# Altium PCB GR_Alim (1).PcbDoc
Units mm, origin at the board's own origin, x right, y up, seen from the top; angles counter-clockwise.
Board outline 100 x 97 mm, 2 copper layers (Top Layer, Bottom Layer); 40 components, 21 nets, 114 pads, 24 vias.
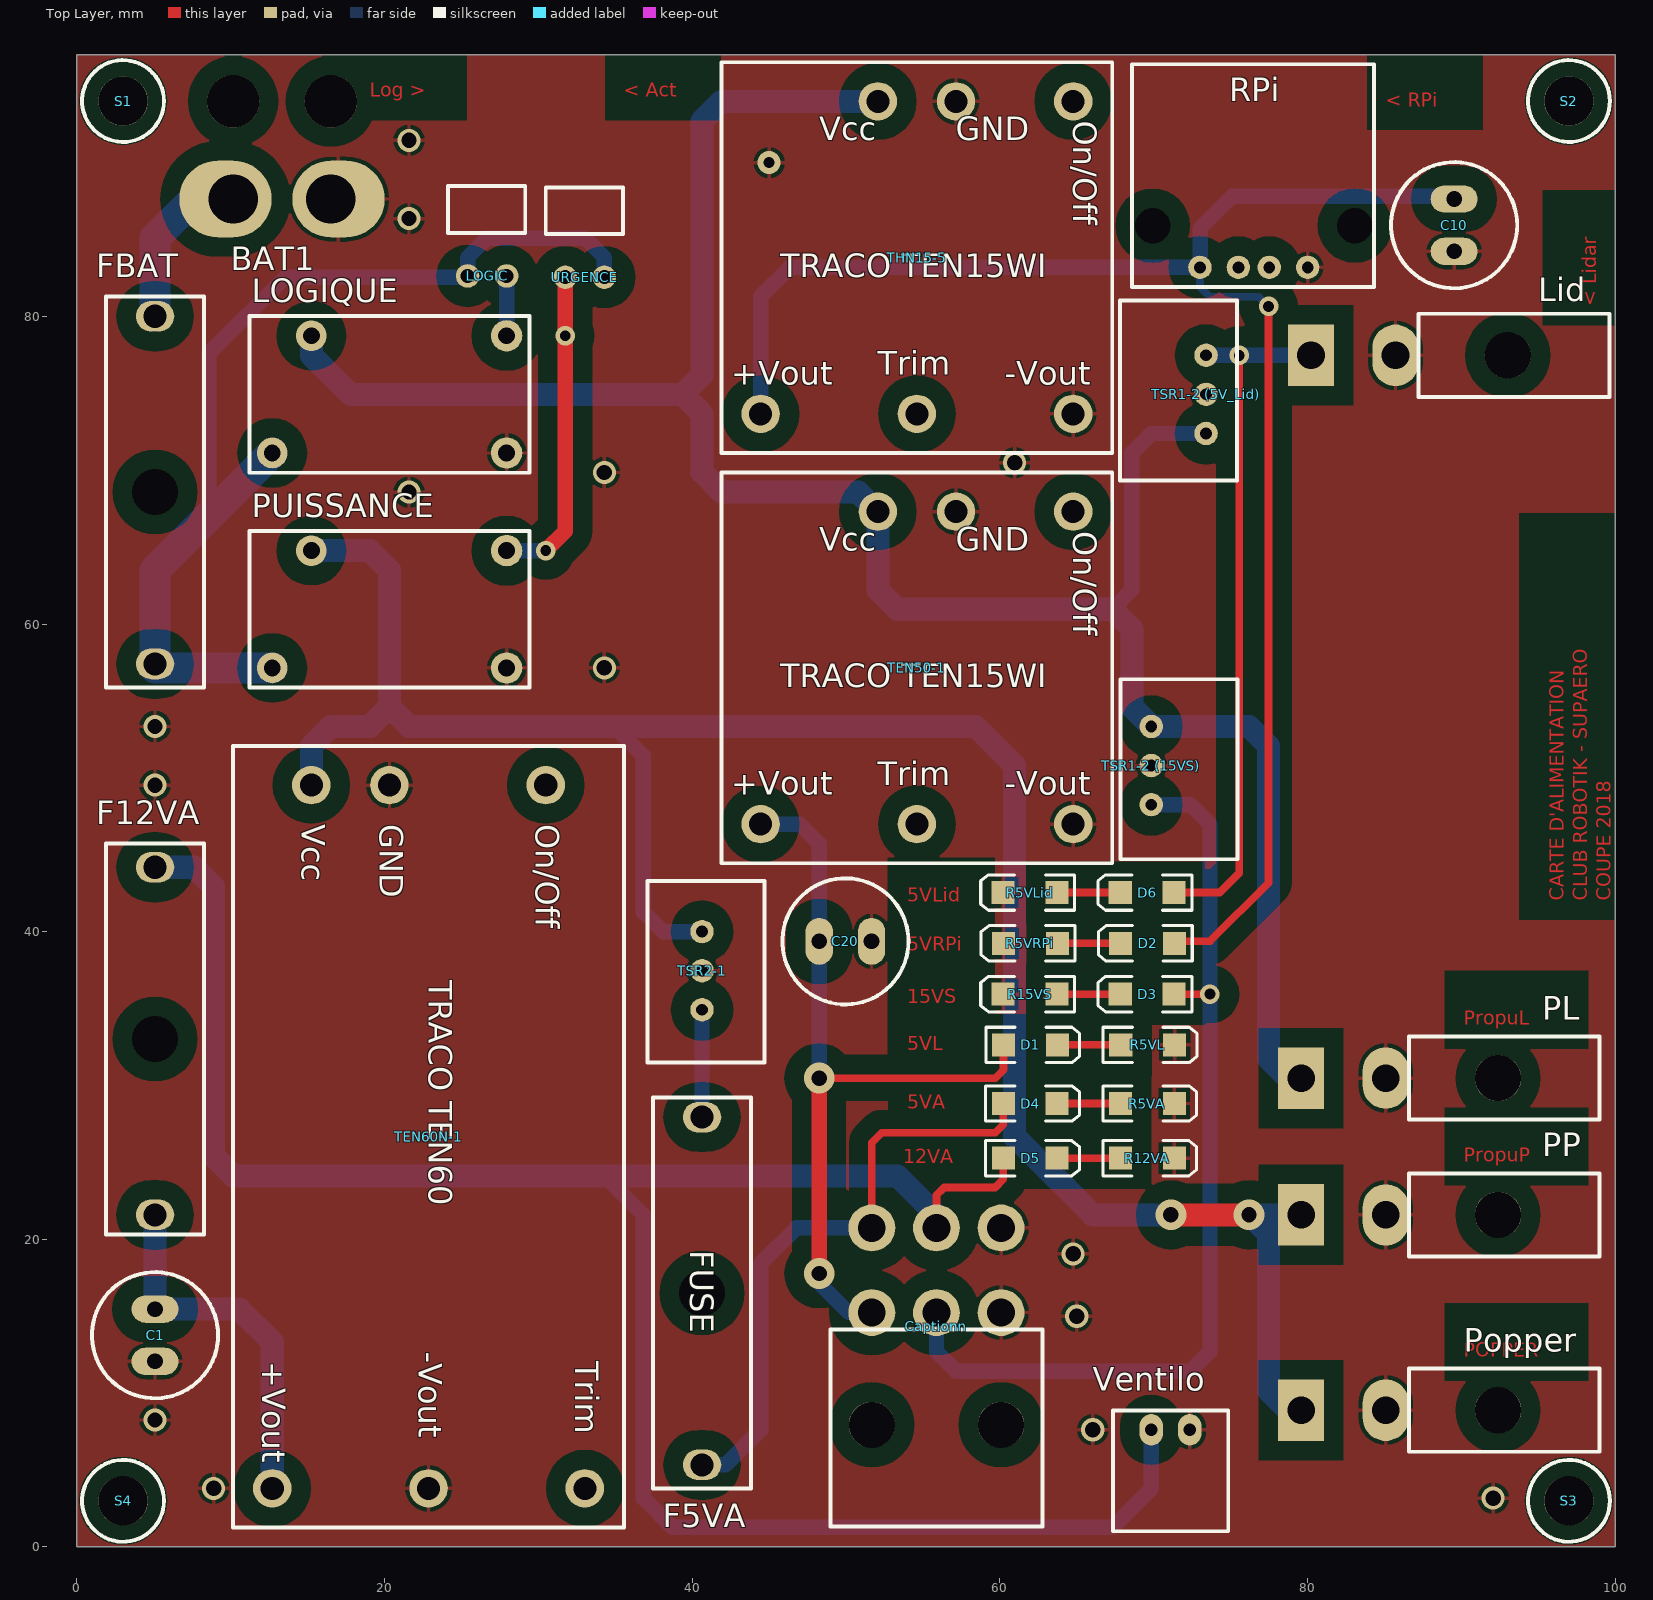
[diagram p0: Top Layer view]
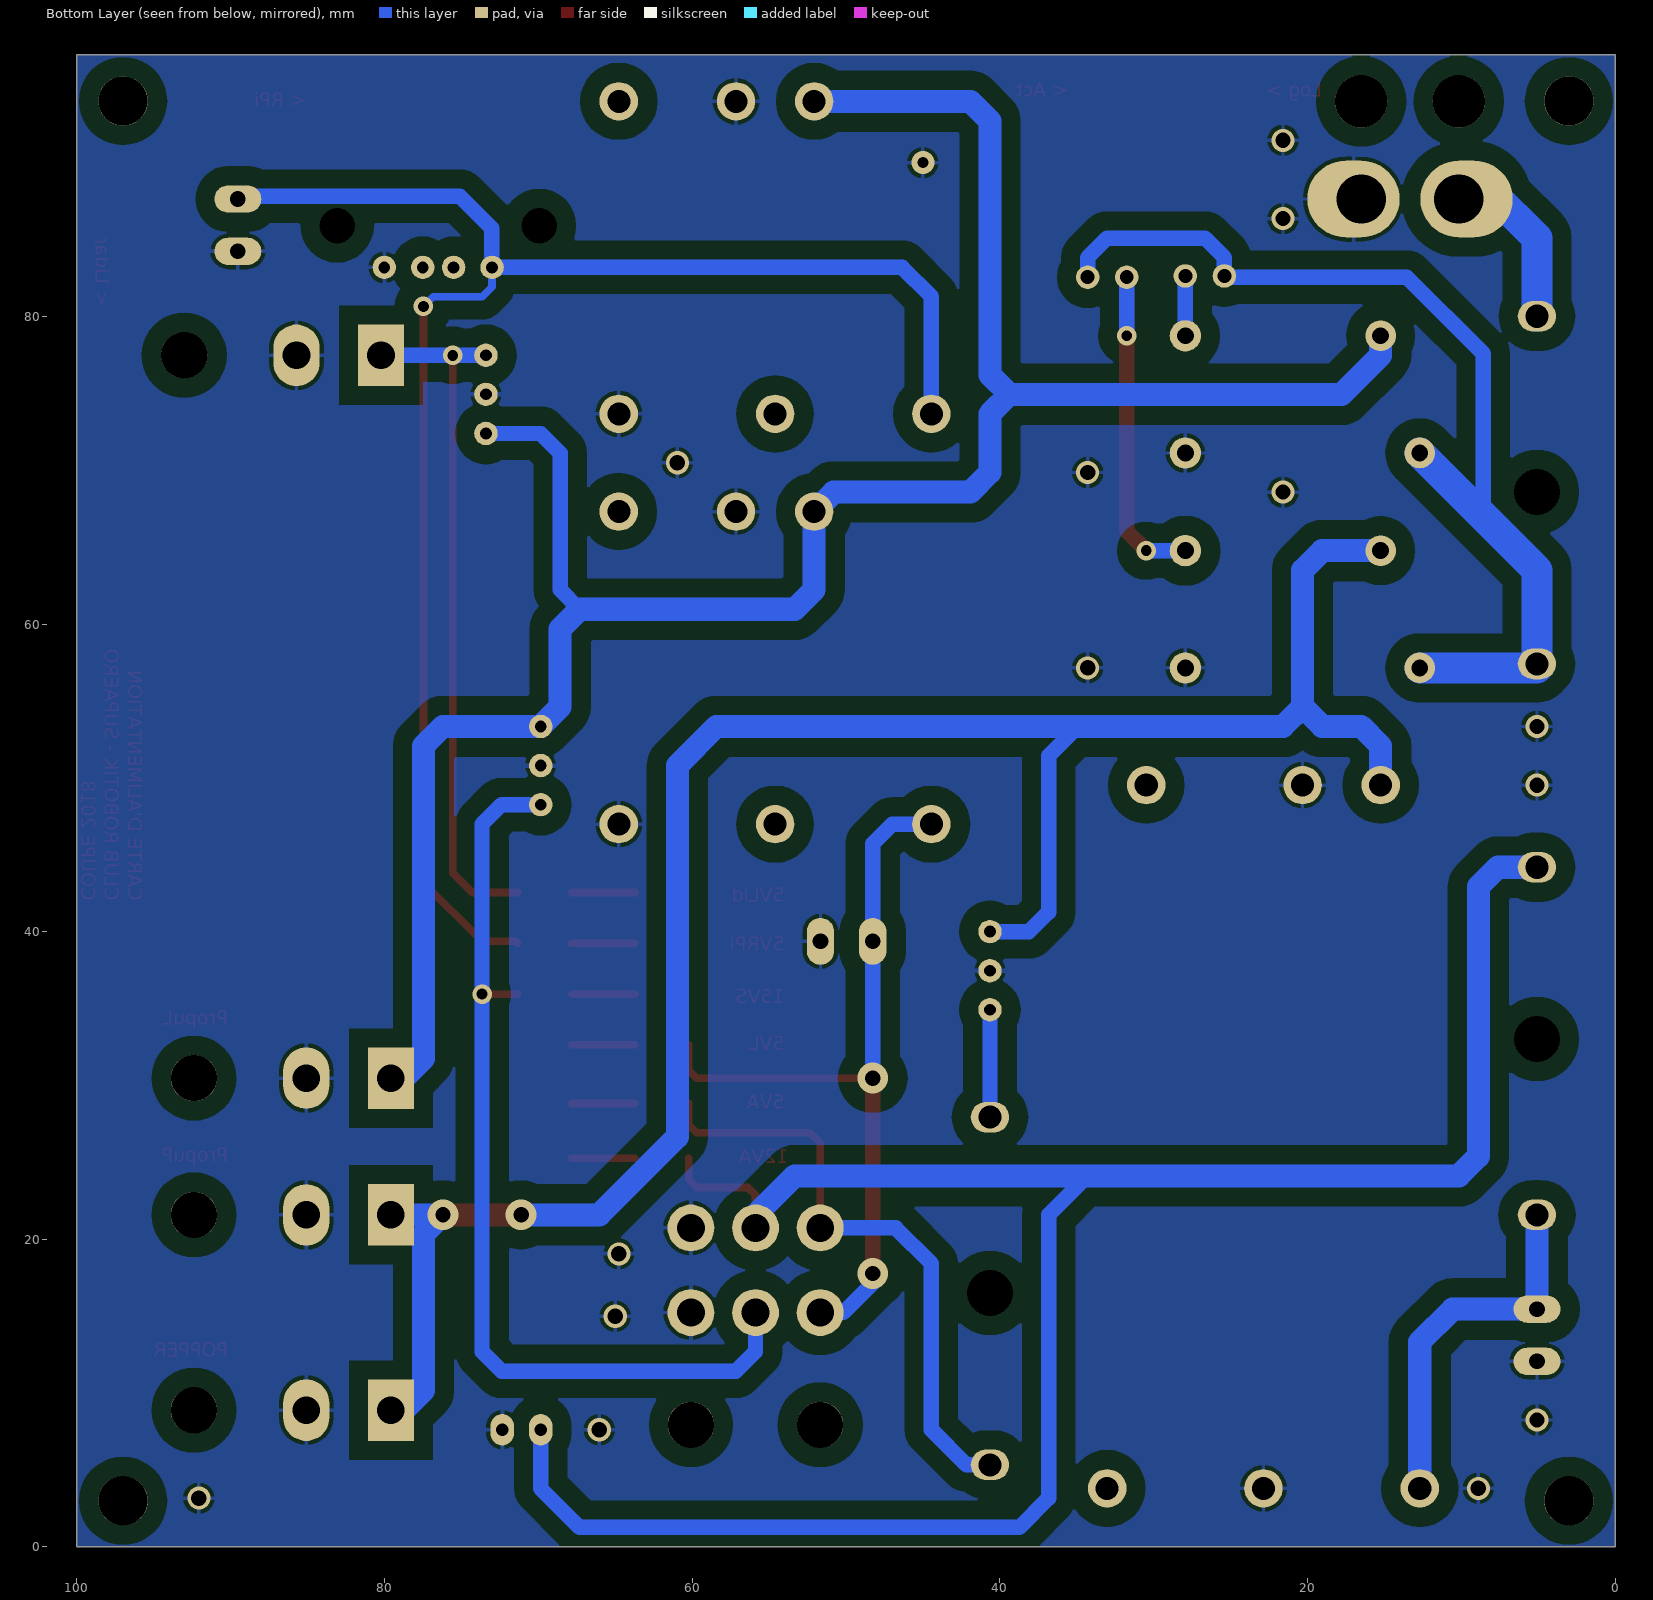
[diagram p1: Bottom Layer view, seen from below]

## Layer stack, top to bottom
Top Solder: solder mask 0.0102, Solder Resist, Dk 3.5
Top Layer: signal copper 0.0356
Dielectric 1: dielectric 0.32, FR-4, Dk 4.8
Bottom Layer: signal copper 0.0356
Bottom Solder: solder mask 0.0102, Solder Resist, Dk 3.5

## Board outline
0,0 100,0 100,97 0,97

## Design rules (kind name [scope] priority, off if disabled: settings)
Clearance [All] p1: gap=0.254 except(1.25: Arc-Poly Track-Poly SMDPad-Poly THPad-Poly Via-Poly Fill-Poly Poly-Poly Poly-Region Poly-Text)
PolygonConnect [All] p1: connectstyle=Relief reliefconductorwidth=0.254 reliefentries=4 polygonreliefangle="90 Angle" airgapwidth=0.254
RoutingVias [All] p1: holewidth=0.711 width=1.27 viastyle="Through Hole" minholewidth=0.711 minwidth=1.27 maxholewidth=0.711 maxwidth=1.27
SolderMaskExpansion [All] p1: expansion=0.102
Width [All] p1: maxlimit=3 minlimit=0.5 preferedwidth=1
30 further rules are at their usual default settings.

## Classes and differential pairs
component class GR_Alim_Puissance: BAT1 C1 C10 C20 Captionn D1 D2 D3 D4 D5 D6 F5VA F12VA FBAT Lid LOGIC LOGIQUE PL Popper PP PUISSANCE R5VA R5VL R5VLid R5VRPi R12VA R15VS RPi TEN50-1 TEN60N-1 THN15-5 "TSR1-2 (5V_Lid)" "TSR1-2 (15VS)" TSR2-1 URGENCE Ventilo

## Components (designator, comment, footprint, x,y, rotation, side; value= is the part's Value field where it differs from the comment)
BAT1 "Batterie 1" "BATTERY SALE" 10.16,87.63 r0 top
C1 "Cap" CONDENSATEUR 5.08,12.065 r90 top
C10 "Cap" CONDENSATEUR 89.535,87.63 r270 top
C20 "Cap" CONDENSATEUR 48.26,39.37 r0 top
Captionn "Header 3X2" MOLEX_MINIFITJR_3X2 55.88,15.24 r0 top
D1 "LED Logique 5V" 3.2X1.6X1.1 61.992,32.639 r0 top
D2 "LED RPi 5V" 3.2X1.6X1.1 69.608,39.243 r180 top
D3 "LED Sonars 15V" 3.2X1.6X1.1 69.58,35.941 r180 top
D4 "LED Actionneurs 5V" 3.2X1.6X1.1 61.976,28.829 r0 top
D5 "LED Actionneurs 12V" 3.2X1.6X1.1 61.976,25.273 r0 top
D6 "LED Actionneurs 12V" 3.2X1.6X1.1 69.58,42.545 r180 top
F5VA "2A" FUSE 40.64,27.94 r270 top
F12VA "5A" FUSE 5.08,21.59 r90 top
FBAT "15A" FUSE 5.08,80.01 r270 top
Lid "Header 2H" MOLEX_MINIFITJR_2X1H#1 85.725,77.47 r0 top
LOGIC "Logic" "MOLEX KK254 2X1H M" 25.4,82.63 r0 top
LOGIQUE "SPST-NO" RELAY 20.32,74.93 r270 top
PL "Header 2H" MOLEX_MINIFITJR_2X1H#2 85.09,30.48 r0 top
Popper "Header 2H" MOLEX_MINIFITJR_2X1H#1 85.09,8.89 r0 top
PP "Header 2H" MOLEX_MINIFITJR_2X1H#1 85.09,21.59 r0 top
PUISSANCE "SPST-NO" RELAY 20.32,60.96 r270 top
R5VA "Res4" 3.2X1.6X1.1 69.596,28.829 r0 top
R5VL "Res1" 3.2X1.6X1.1 69.612,32.639 r0 top
R5VLid "Res5" 3.2X1.6X1.1 61.96,42.545 r180 top
R5VRPi "Res2" 3.2X1.6X1.1 61.988,39.243 r180 top
R12VA "Res5" 3.2X1.6X1.1 69.596,25.273 r0 top
R15VS "Res3" 3.2X1.6X1.1 61.96,35.941 r180 top
RPi "USB_A" "USB CONNECTOR" 80.01,83.185 r180 top
S1 "Comment" "Screw M3" 3,94 r0 top
S2 "Comment" "Screw M3" 97,94 r0 top
S3 "Comment" "Screw M3" 97,3 r0 top
S4 "Comment" "Screw M3" 3,3 r0 top
TEN50-1 "TEN50" TRACO_1x1inch 52.07,67.31 r0 top
TEN60N-1 "TEN60N-2412 (12VActionneurs)" TRACO_2X1INCH 15.24,49.53 r270 top
THN15-5 "THN15WI-2411 (RPi)" TRACO_1X1INCH 52.07,93.98 r0 top
"TSR1-2 (5V_Lid)" "TSR 1-2450" TRS 73.406,72.39 r270 top
"TSR1-2 (15VS)" "TSR 1-24150" TRS 69.85,53.34 r90 top
TSR2-1 "TSR2-2450 (5V actionneurs)" "TRS - centered" 40.64,40.005 r90 top
URGENCE "Urgence" "MOLEX KK254 2X1H M" 31.75,82.55 r0 top
Ventilo "Header 2H" "Molex SPOX 2x1H" 69.85,7.62 r0 top

## Footprints (in the part's own frame and the unit in brackets; to place one, negate y for a bottom-side part, rotate by r counter-clockwise, add the part's x,y. Pads: shape width x height; smd on the part's side, far side on the other; paste and mask are expansions set on the pad)
3.2X1.6X1.1 [mm] "SMT LED; 2 Flat Leads"
  rect 1.5x1.5 smd: 1(-1.75,0) 2(1.75,0)
  silkscreen extent -2.9,-1.15 3.2,1.15
"BATTERY SALE" [mm] "Connecteur Batterie"
  round 3.4 hole 3.4: 0(0,6.35) 0(6.35,6.35)
  oval 6x5 hole 3.2 copper offset -0.5,0: 1(0,0)
  oval 6x5 hole 3.2 copper offset 0.5,0: 2(6.35,0)
CONDENSATEUR [mil]
  oval 70x120 hole 40: 1(0,0) 2(133.86,0)
  silkscreen extent -94,-161 228,161, body extent -93,-160 227,160, height 500
FUSE [mm] "Porte-fusible monté sur circuit 10 (UL) A, 6.3 (VDE) A, fusible Cartouche, 893-0574"
  round 2 hole 3: 0(11.43,0)
  oval 2x2.5 hole 1.5: 1(0,0) 2(22.6,0)
  silkscreen extent -1.27,-3.18 24.13,3.18, body extent -1.27,-4.29 24.13,4.29, height 11.41
"MOLEX KK254 2X1H M" [mil] "22-05-7028"
  round 60 hole 35.43: 1(0,0) 2(100,0)
  silkscreen extent -50,110 148,230, body extent -50,-12 150,568, height 230
"Molex SPOX 2x1H" [mil] "Prise CI, Molex, 3 Contacts, 1 rangée, entraxe 2.5mm, 3A, Coudé, ref 22-03-5035"
  oval 60x80 hole 31.5: 1(0,0) 2(98.43,0)
  silkscreen extent -98,-260 197,49, body extent -98,-262 193,49, height 193
MOLEX_MINIFITJR_2X1H#1 [mm] "Connecteur Molex 2"
  rect 3x4 hole 1.8: 1(-5.5,0)
  oval 3x4 hole 1.8: 2(0,0)
  round 3 hole 3 unplated: 3(7.3,0)
  silkscreen extent 1.5,-2.7 13.9,2.7, body extent -6.03,-2.7 13.9,3.1, height 11.01
MOLEX_MINIFITJR_2X1H#2 [mm] "Connecteur Molex 2"
  rect 3x4 hole 1.8: 1(-5.5,0)
  oval 3x4 hole 1.8 unplated: 2(0,0)
  round 3 hole 3 unplated: 3(7.3,0)
  silkscreen extent 1.5,-2.7 13.9,2.7, body extent -6.03,-2.7 13.9,3.1, height 11.01
MOLEX_MINIFITJR_3X2 [mm] "MOLEX_MINIFITJR_3X2, 39-30-1060"
  round 3.048 hole 1.8: 0(-4.2,5.5) 1(0,5.5) 3(-4.2,0) 4(0,0) 5(4.2,0)
  round 3.048 hole 1.8 unplated: 2(4.2,5.5)
  round 3 hole 3 unplated: 10(-4.2,-7.3) 11(4.2,-7.3)
  silkscreen extent -6.9,-13.9 6.9,-1.1, body extent -6.9,-13.9 7.3,6.04, height 11.41
RELAY [mm] "SPST-NO Relay"
  round 2 hole 1.1: 1(3.81,-7.62) 2(-3.81,-5.08)
  round 2.032 hole 1.1: 3(-3.81,7.62) 4(3.81,7.62)
  silkscreen extent -5.09,-9.09 5.09,9.09, body extent -5.08,-9.14 5.08,9.14, height 15
"Screw M3" [mm] "M3 iso Screw"
  round 3.2 hole 3.2 unplated: 0(0,0)
  silkscreen extent -2.66,-2.66 2.66,2.66
TRACO_1x1inch [mm]
  round 2.5 hole 1.5: 1(0,0) 2(5.08,0) 3(-7.62,-20.32) 4(2.54,-20.32) 5(12.7,-20.32) 6(12.7,0)
  silkscreen extent -10.16,-22.86 15.24,2.54, body extent -10.16,-22.86 15.24,2.54, height 10.11
TRACO_1X1INCH [mm]
  round 2.5 hole 1.5: 1(0,0) 2(5.08,0) 3(-7.62,-20.32) 4(2.54,-20.32) 5(12.7,-20.32) 6(12.7,0)
  silkscreen extent -10.16,-22.86 15.24,2.54, body extent -10.16,-22.86 15.24,2.54, height 10.11
TRACO_2X1INCH [mm]
  round 2.5 hole 1.5: 1(0,0) 2(0,5.08) 3(0,15.24) 4(45.72,-2.54) 5(45.72,7.62) 6(45.72,17.78)
  silkscreen extent -2.54,-5.08 48.26,20.32, body extent -2.54,-5.08 48.26,20.32, height 10.21
TRS [mil]
  round 60 hole 30: 1(0,0) 2(-100,0) 3(-200,0)
  silkscreen extent -340,-220 121,79, body extent -341,-218 120,78, height 398
"TRS - centered" [mil]
  round 60 hole 30: 1(0,0) 2(-100,0) 3(-200,0)
  silkscreen extent -335,-160 130,139, body extent -330,-157 130,138, height 398
"USB CONNECTOR" [mil] "87520-0010BLF"
  round 60 hole 90.55: 4(-120.87,-106.69) 4(396.46,-106.69)
  round 60 hole 30: D+(98.43,0) D-(177.17,0) VCC(275.59,0)
  round 60 hole 30 unplated: GND(0,0)
  silkscreen extent -170,-520 450,50, body extent -173,-519 448,49, height 293

## Part data
BAT1 LOGIC URGENCE: library part "Header 2", "Header, 2-Pin"
C1 C10 C20: "Capacitor"
Captionn: "Header, 3-Pin, Dual row"
D1 D2 D3 D4 D5 D6: library part LED2, "Typical RED, GREEN, YELLOW, AMBER GaAs LED"
F5VA F12VA FBAT: library part "Fuse 1", "Fuse"
Lid PL Popper PP Ventilo: "Header, 2-Pin, Right Angle"
LOGIQUE PUISSANCE: library part Relay-SPST, "OJ-SS-124LMH2,005"
R5VA R5VL R5VLid R12VA R15VS: library part Res2, "Resistor"
R5VRPi: "Resistor"
TEN50-1: "TRACO TEN50"
TEN60N-1: library part TEN60N, "TRACO TEN60N"
THN15-5: library part THN15WI
"TSR1-2 (5V_Lid)" "TSR1-2 (15VS)" TSR2-1: library part "Volt Reg", "Voltage Regulator"

## Via types
v1: diameter 1.5, hole 1, Top Layer to Bottom Layer, 14 vias
v2: diameter 1.27, hole 0.711, Top Layer to Bottom Layer, 5 vias
v3: diameter 2, hole 1, Top Layer to Bottom Layer, 4 vias
v4: diameter 1.5, hole 0.711, Top Layer to Bottom Layer, 1 vias

## Nets (pads, with @x,y where several pads share a name; then routed paths per layer and width w, separated by ;. In a path a pad name is that pad's centre, name@x,y a point inside that pad or via, vN(x,y) a via of type N, cw(c..) or ccw(c..) an arc to the next point about the centre after c; other vN are vias at no path point)
5VA: Captionn.0 D4.1 F5VA.2 | length 38.4
  Top Layer w0.5: Captionn.0 51.68,26.28 52.324,26.924 59.69,26.924 60.226,27.46 D4.1
  Bottom Layer w1: F5VA.2 42.17,5.34 44.45,7.62 44.45,18.415 46.775,20.74 Captionn.0@50.41,20.74
5VL: C20.1 Captionn.3 D1.1 TEN50-1.3 | length 50.6
  Top Layer w0.5: v3(48.26,30.48) 59.69,30.48 60.242,31.032 D1.1
  Top Layer w1: v3(48.26,17.78) v3(48.26,30.48)
  Bottom Layer w1: TEN50-1.3 46.99,46.99 48.26,45.72 C20.1 v3(48.26,30.48) ; v3@48.035,17.37 50.165,15.24 Captionn.3
5VLID: "TSR1-2 (5V_Lid).3" D6.1 Lid.1 | length 45.2
  Top Layer w0.5: D6.1 74.295,42.545 75.565,43.815 v2(75.565,77.47)
  Bottom Layer w1: 73.406,77.47 Lid.1
5VRPI: C10.1 D2.1 RPi.VCC THN15-5.3 | length 108.3
  Top Layer w0.5: D2.1 71.485,39.37 73.66,39.37 77.47,43.18 v2@77.47,80.526
  Bottom Layer w0.5: RPi.VCC 73.01,81.93 73.66,81.28 76.835,81.28 v2(77.47,80.645)
  Bottom Layer w1: THN15-5.3 44.45,81.28 46.355,83.185 RPi.VCC 73.025,83.2 73.025,85.725 75.099,87.799 89.366,87.799 C10.1
12VA: Captionn.1 D5.1 F12VA.2 Ventilo.1 | length 140.7
  Top Layer w0.5: Captionn.1 55.88,22.86 56.388,23.368 59.69,23.368 60.226,23.904 D5.1
  Bottom Layer w1: 34.29,24.13 36.83,21.59 36.83,3.17 38.73,1.27 67.31,1.27 69.85,3.81 69.85,7.85 Ventilo.1@70,8 ; Captionn.1 Captionn.1@55.88,21.59
  Bottom Layer w1.5: F12VA.2 7.62,44.19 8.89,42.92 8.89,25.4 10.16,24.13 53.34,24.13 Captionn.1@55.88,21.59
15VS: "TSR1-2 (15VS).3" Captionn.4 D3.1 | length 62.3
  Top Layer w0.5: D3.1 v2(73.66,35.941)
  Bottom Layer w1: Captionn.4 55.88,12.7 57.15,11.43 72.39,11.43 73.66,12.7 73.66,46.99 72.39,48.26 69.85,48.26
GND: "TSR1-2 (5V_Lid).2" "TSR1-2 (15VS).2" BAT1.2 C1.1 C10.2 C20.2 Captionn.2 Captionn.5 Lid.2 LOGIQUE.4 PL.2 Popper.2 PP.2 PUISSANCE.4 R5VA.2 R5VL.2 R5VLid.2 R5VRPi.2 R12VA.2 R15VS.2 RPi.GND TEN50-1.2 TEN50-1.5 TEN60N-1.2 TEN60N-1.5 THN15-5.2 THN15-5.5 TSR2-1.2 Ventilo.2
  other v1: 92.075,3.175 8.89,3.81 66.04,7.62 5.08,8.255 65,15 64.77,19.05 5.08,49.53 5.08,53.34 34.29,57.15 21.59,68.58 34.29,69.85 60.96,70.485 21.59,86.36 21.59,91.44
  other v4: 45,90
LOGIQUE: "TSR1-2 (5V_Lid).1" "TSR1-2 (15VS).1" LOGIQUE.2 PL.1 TEN50-1.1 THN15-5.1 | length 151.5
  Bottom Layer w1: 67.31,60.96 68.58,62.23 68.58,71.12 69.85,72.39 73.406,72.39 ; PL.1@78.74,30.48 PL.1
  Bottom Layer w1.5: LOGIQUE.2 15.24,77.47 17.78,74.93 39.37,74.93 ; THN15-5.1 41.91,93.98 40.64,92.71 40.64,76.2 39.37,74.93 ; PL.1@78.74,30.48 77.47,31.75 77.47,52.07 76.2,53.34 69.85,53.34 68.58,54.61 68.58,59.69 67.31,60.96 53.34,60.96 52.07,62.23 TEN50-1.1 50.8,68.58 41.91,68.58 40.64,69.85 40.64,73.66 39.37,74.93
NetBAT1_1: BAT1.1 FBAT.1 | length 11.2
  Bottom Layer w2: FBAT.1 5.08,85.09 7.99,88 BAT1.1@10,88
NetC1_2: C1.2 F12VA.1 TEN60N-1.4 | length 24.2
  Bottom Layer w1.5: F12VA.1 C1.2 10.57,15.465 12.7,13.335 TEN60N-1.4
NetD1_2: D1.2 R5VL.1 | length 4.1
  Top Layer w0.5: D1.2 R5VL.1
NetD2_2: D2.2 R5VRPi.1 | length 4.1
  Top Layer w0.5: R5VRPi.1 D2.2
NetD3_2: D3.2 R15VS.1 | length 4.1
  Top Layer w0.5: R15VS.1 D3.2
NetD4_2: D4.2 R5VA.1 | length 4.1
  Top Layer w0.5: D4.2 R5VA.1
NetD5_2: D5.2 R12VA.1 | length 4.1
  Top Layer w0.5: D5.2 R12VA.1
NetD6_2: D6.2 R5VLid.1 | length 4.1
  Top Layer w0.5: R5VLid.1 D6.2
NetF5VA_1: F5VA.1 TSR2-1.3 | length 7
  Bottom Layer w1: F5VA.1 TSR2-1.3
NetFBAT_2: FBAT.2 LOGIC.1 LOGIQUE.1 PUISSANCE.1 URGENCE.2 | length 66.6
  Bottom Layer w1: FBAT.2@5.08,57.785 FBAT.2@5.715,57.15 ; 8.572,67.31 8.572,77.572 13.55,82.55 LOGIC.1@25.4,82.55 ; LOGIC.1 25.4,83.82 26.67,85.09 33.02,85.09 34.29,83.82 URGENCE.2
  Bottom Layer w2: FBAT.2@5.08,57.15 PUISSANCE.1 ; FBAT.2@5.08,57.785 5.08,63.5 LOGIQUE.1
NetLOGIC_1: LOGIC.2 LOGIQUE.3 | length 3.9
  Bottom Layer w1: LOGIQUE.3 LOGIC.2
NetPUISSANCE_3: PUISSANCE.3 URGENCE.1 | length 24.7
  Top Layer w1: v2(30.48,64.77) 31.75,66.04 v2(31.75,78.74) URGENCE.1
  Bottom Layer w1: PUISSANCE.3 v2(30.48,64.77) ; v2(31.75,78.74) URGENCE.1
PUISSANCE: Popper.1 PP.1 PUISSANCE.2 TEN60N-1.1 TSR2-1.1 | length 142
  Top Layer w1.5: v3(71.12,21.59) v3(76.2,21.59)
  Bottom Layer w1: 34.925,53.34 36.83,51.435 36.83,41.275 38.1,40.005 TSR2-1.1
  Bottom Layer w1.5: TEN60N-1.1 15.24,52.07 16.51,53.34 19.05,53.34 20.32,54.61 ; PUISSANCE.2 19.05,64.77 20.32,63.5 20.32,54.61 ; v3(71.12,21.59) 66.04,21.59 60.96,26.67 60.96,50.8 58.42,53.34 21.59,53.34 20.32,54.61 ; Popper.1 78.74,8.89 77.47,10.16 77.47,20.32 v3(76.2,21.59) PP.1
pads on no net: BAT1.0 Captionn.10 Captionn.11 F5VA.0 F12VA.0 FBAT.0 Lid.3 PL.3 Popper.3 PP.3 RPi.4 RPi.D+ RPi.D- S1.0 S2.0 S3.0 S4.0 TEN50-1.4 TEN50-1.6 TEN60N-1.3 TEN60N-1.6 THN15-5.4 THN15-5.6

## Polygon pours and split planes (outlines as drawn)
GND on Top Layer "Top GND" (solid, pour order 14): 0,97 100,97 100,0 0,0
GND on Bottom Layer "Bot GND" (solid, pour order 16): 0,97 100,97 100,0 0,0

## Other copper
Top Layer:
  text "Log >" at 19.05,93.98 h1.52
  text "< Act" at 35.56,93.98 h1.52
  text "< RPi" at 85.09,93.345 h1.52
  text "< Lidar" at 99.06,80.645 h1.52 r90
  text "CARTE D'ALIMENTATION / CLUB ROBOTIK - SUPAERO / COUPE 2018" at 100,42 h1.52 r90
  text "5VLid" at 53.975,41.656 h1.52
  text "5VRPi" at 53.975,38.481 h1.52
  text "15VS" at 53.975,35.052 h1.52
  text "PropuL" at 90.17,33.655 h1.52
  text "5VL" at 53.975,32.004 h1.52
  text "5VA" at 53.975,28.194 h1.52
  text "PropuP" at 90.17,24.765 h1.52
  text "12VA" at 53.721,24.638 h1.52
  text "POPPER" at 90.17,12.065 h1.52

## Silkscreen, mask and mechanical layers (free items; w line width, h text height)
Mechanical 2:
  the board outline again, w0.254

## Dimensions
0,0 to 100,0 on Mechanical 1

## Text inside footprints (layer, text, board x,y; h text height)
F5VA: Top Overlay "FUSE" at 39.878,19.304 h1.52 r270
TEN50-1: Top Overlay "On/Off" at 64.77,66.04 h1.52 r270; Top Overlay "GND" at 57.15,64.77 h1.52; Top Overlay "Vcc" at 48.26,64.77 h1.52; Top Overlay "-Vout" at 60.325,48.895 h1.52; Top Overlay "Trim" at 52.07,49.53 h1.52; Top Overlay "+Vout" at 42.545,48.895 h1.52; Top Overlay "TRACO TEN15WI" at 45.72,55.88 h1.52
TEN60N-1: Top Overlay "GND" at 19.685,46.99 h1.52 r270; Top Overlay "On/Off" at 29.845,46.99 h1.52 r270; Top Overlay "+Vout" at 12.065,12.065 h1.52 r270; Top Overlay "-Vout" at 22.225,12.7 h1.52 r270; Top Overlay "Trim" at 32.385,12.065 h1.52 r270; Top Overlay "TRACO TEN60" at 22.86,36.83 h1.52 r270; Top Overlay "Vcc" at 14.605,46.99 h1.52 r270
THN15-5: Top Overlay "TRACO TEN15WI" at 45.72,82.55 h1.52; Top Overlay "+Vout" at 42.545,75.565 h1.52; Top Overlay "Trim" at 52.07,76.2 h1.52; Top Overlay "-Vout" at 60.325,75.565 h1.52; Top Overlay "Vcc" at 48.26,91.44 h1.52; Top Overlay "GND" at 57.15,91.44 h1.52; Top Overlay "On/Off" at 64.77,92.71 h1.52 r270